# EAGLE board Rocket Panel v1.1 (EAGLE 5.06)
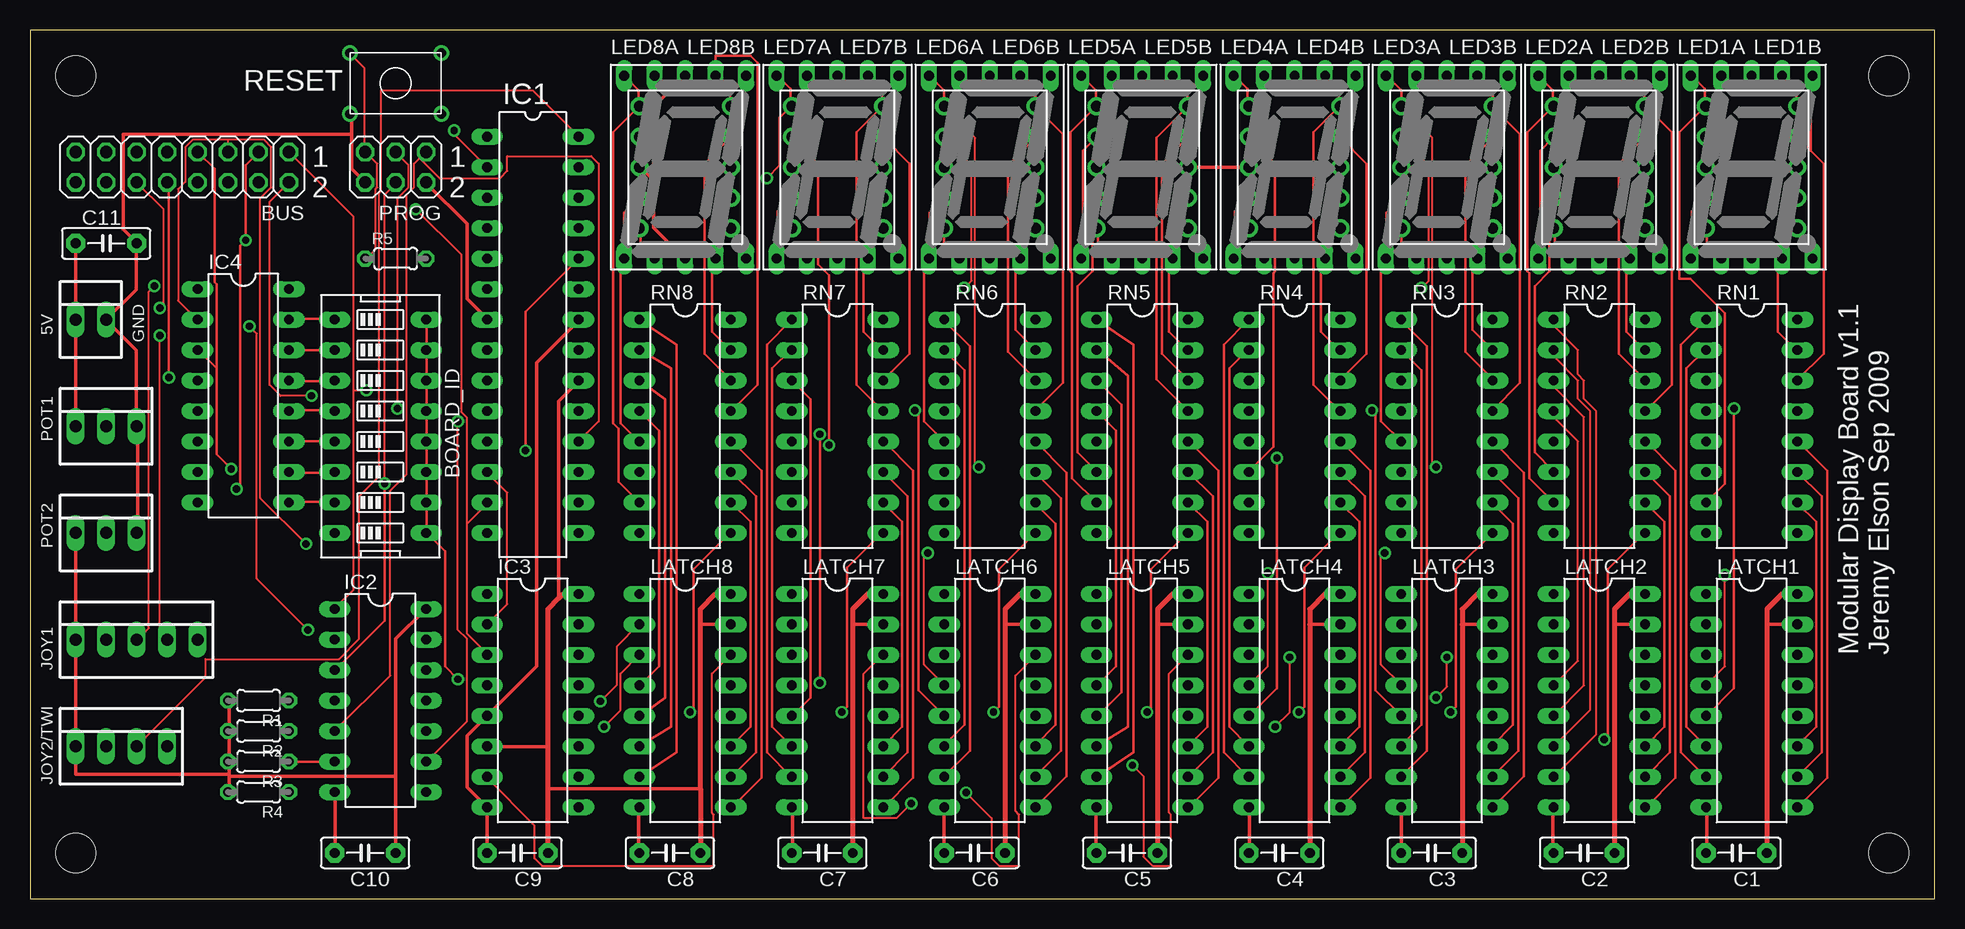
[diagram p0: board, top side]
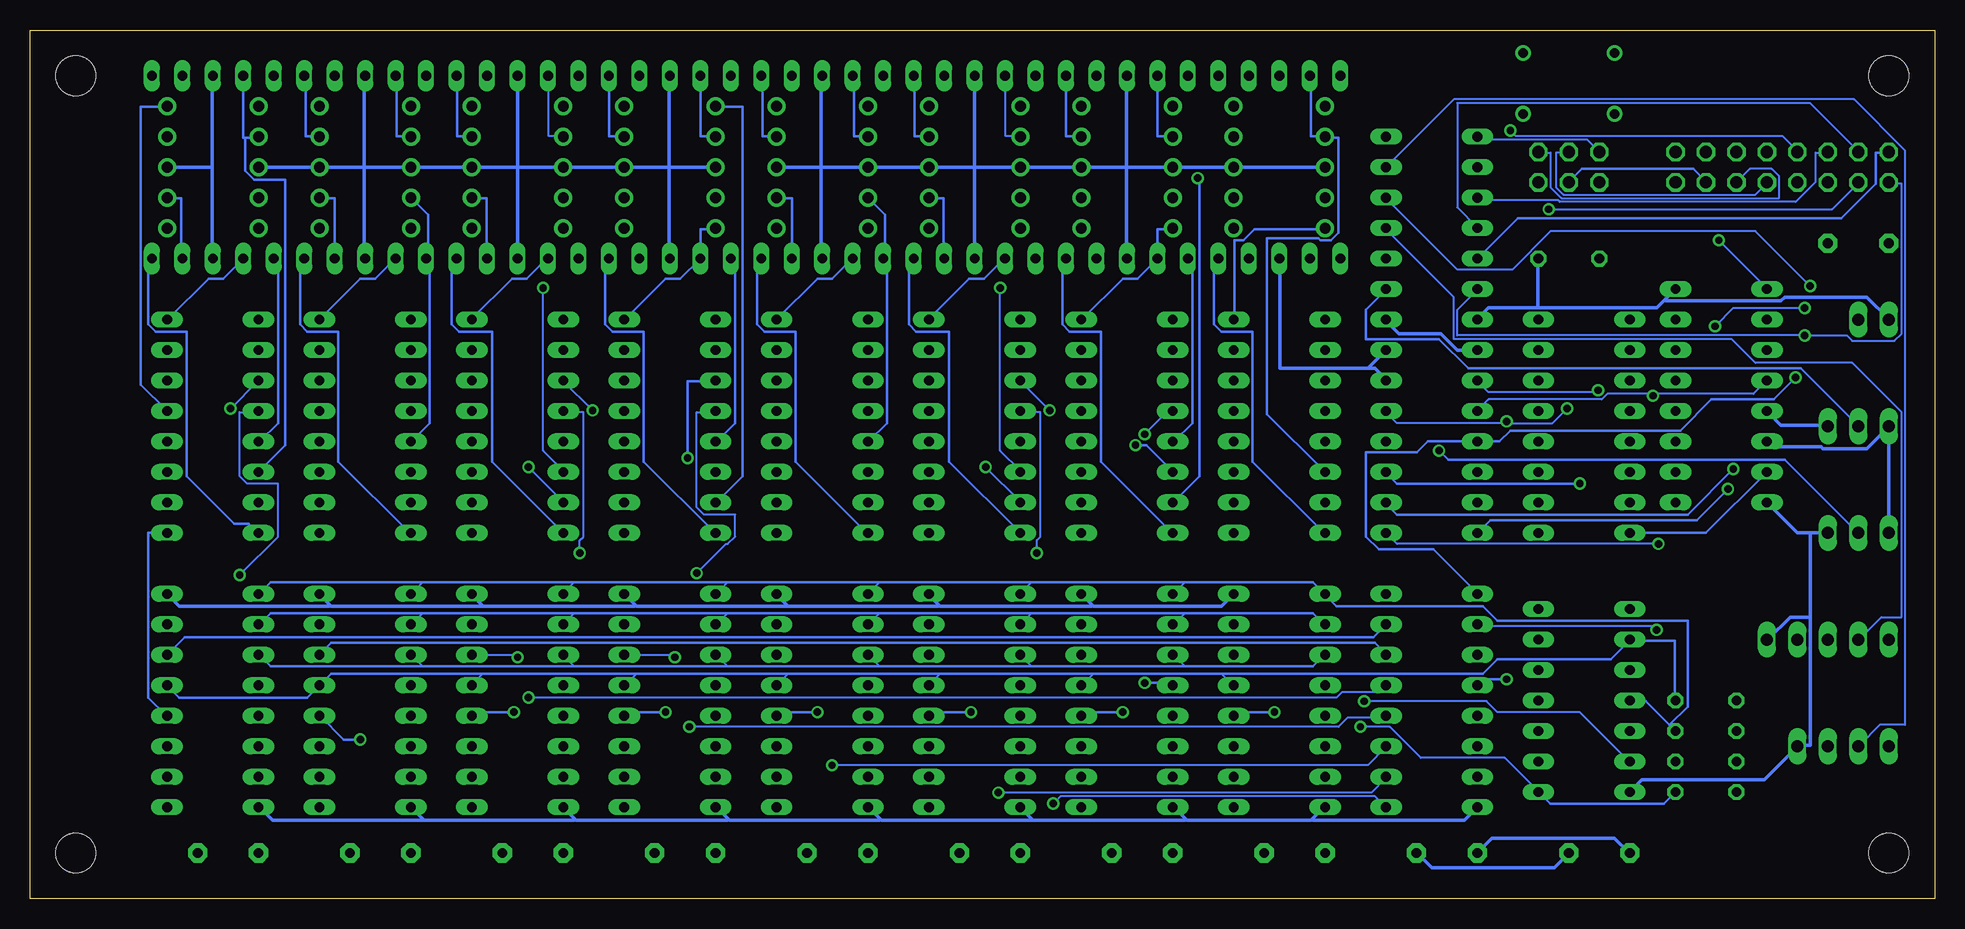
[diagram p1: board, bottom side, seen from below]

Size 158.75 x 72.39 mm. Coordinates in mm from the lower left corner, seen from the top.
Outline: 0,0 158.75,0 158.75,72.39 0,72.39 0,0
Copper layers (1*16): Top 0.035mm / dielectric 1.5mm / Bottom 0.035mm
Design rules "OurPCB *": minimum track width 6mil, minimum drill 24mil, track to track 6mil, track to pad 6mil, pad to pad 20mil, via to via 6mil, smd to smd 8mil, copper to edge 40mil, drill to drill 8mil, minimum pad ring 10mil, minimum via ring 8mil, stop-mask expansion 4mil, vias tented up to drill 0mil, thermal gap 10mil
Net classes: 0 default: width 0.152 mm, drill 0.152 mm, clearance 0.152 mm; 1 power: width 0.305 mm, drill 0.305 mm, clearance 0.152 mm to class 0, clearance 0.152 mm

## Footprints (pad centres in the part's own frame; a part is rotated, then mirrored left to right if it is on the bottom)
22-23-2021 = drill 1 long: 1 -1.27,0; 2 1.27,0
EDG-08 = drill 0.813 long: 1 -8.89,-3.81; 2 -6.35,-3.81; 3 -3.81,-3.81; 4 -1.27,-3.81; 5 1.27,-3.81; 6 3.81,-3.81; 7 6.35,-3.81; 8 8.89,-3.81; 9 8.89,3.81; 10 6.35,3.81; 11 3.81,3.81; 12 1.27,3.81; 13 -1.27,3.81; 14 -3.81,3.81; 15 -6.35,3.81; 16 -8.89,3.81
2X08 = drill 1.016 octagon: 1 -8.89,-1.27; 2 -8.89,1.27; 3 -6.35,-1.27; 4 -6.35,1.27; 5 -3.81,-1.27; 6 -3.81,1.27; 7 -1.27,-1.27; 8 -1.27,1.27; 9 1.27,-1.27; 10 1.27,1.27; 11 3.81,-1.27; 12 3.81,1.27; 13 6.35,-1.27; 14 6.35,1.27; 15 8.89,-1.27; 16 8.89,1.27
C5B2.5 = drill 0.813 pad 1.6 octagon: 1 -2.54,0; 2 2.54,0
DIL28-3 = drill 0.813 long: 1 -16.51,-3.81; 2 -13.97,-3.81; 3 -11.43,-3.81; 4 -8.89,-3.81; 5 -6.35,-3.81; 6 -3.81,-3.81; 7 -1.27,-3.81; 8 1.27,-3.81; 9 3.81,-3.81; 10 6.35,-3.81; 11 8.89,-3.81; 12 11.43,-3.81; 13 13.97,-3.81; 14 16.51,-3.81; 15 16.51,3.81; 16 13.97,3.81; 17 11.43,3.81; 18 8.89,3.81; 19 6.35,3.81; 20 3.81,3.81; 21 1.27,3.81; 22 -1.27,3.81; 23 -3.81,3.81; 24 -6.35,3.81; 25 -8.89,3.81; 26 -11.43,3.81; 27 -13.97,3.81; 28 -16.51,3.81
DIL14 = drill 0.813 long: 1 -7.62,-3.81; 2 -5.08,-3.81; 3 -2.54,-3.81; 4 0,-3.81; 5 2.54,-3.81; 6 5.08,-3.81; 7 7.62,-3.81; 8 7.62,3.81; 9 5.08,3.81; 10 2.54,3.81; 11 0,3.81; 12 -2.54,3.81; 13 -5.08,3.81; 14 -7.62,3.81
DIL16 = drill 0.813 long: 1 -8.89,-3.81; 2 -6.35,-3.81; 3 -3.81,-3.81; 4 -1.27,-3.81; 5 1.27,-3.81; 6 3.81,-3.81; 7 6.35,-3.81; 8 8.89,-3.81; 9 8.89,3.81; 10 6.35,3.81; 11 3.81,3.81; 12 1.27,3.81; 13 -1.27,3.81; 14 -3.81,3.81; 15 -6.35,3.81; 16 -8.89,3.81
22-23-2051 = drill 1 long: 1 -5.08,0; 2 -2.54,0; 3 0,0; 4 2.54,0; 5 5.08,0
22-23-2041 = drill 1 long: 1 -3.81,0; 2 -1.27,0; 3 1.27,0; 4 3.81,0
STAND-OFF = hole 3.302: 0,0
HDSP-M = drill 0.813 long: 1 -5.08,-7.62; 2 -2.54,-7.62; 3 0,-7.62; 4 2.54,-7.62; 5 5.08,-7.62; 6 5.08,7.62; 7 2.54,7.62; 8 0,7.62; 9 -2.54,7.62; 10 -5.08,7.62
LA-401 = drill 0.9 pad 1.5 round: 1 -3.81,5.08; 2 -3.81,2.54; 3 -3.81,0; 4 -3.81,-2.54; 5 -3.81,-5.08; 6 3.81,-5.08; 7 3.81,-2.54; 8 3.81,0; 9 3.81,2.54; 10 3.81,5.08
22-23-2031 = drill 1 long: 1 -2.54,0; 2 0,0; 3 2.54,0
2X03 = drill 1.016 octagon: 1 -2.54,-1.27; 2 -2.54,1.27; 3 0,-1.27; 4 0,1.27; 5 2.54,-1.27; 6 2.54,1.27
0204/5 = drill 0.813 octagon: 1 -2.54,0; 2 2.54,0
KSA_SWITCH_2X3MIL = drill 0.8 round: 1 -3.81,2.54; 2 3.81,2.54; 3 -3.81,-2.54; 4 3.81,-2.54

## Placement (x,y rotation side)
5V  [22-23-2021]  5.08,48.26 0 top
BOARD_ID  [EDG-08]  29.21,39.37 270 top
BUS  [2X08]  12.7,60.96 180 top
C1  [C5B2.5]  142.24,3.81 180 top
C2  [C5B2.5]  129.54,3.81 180 top
C3  [C5B2.5]  116.84,3.81 180 top
C4  [C5B2.5]  104.14,3.81 180 top
C5  [C5B2.5]  91.44,3.81 180 top
C6  [C5B2.5]  78.74,3.81 180 top
C7  [C5B2.5]  66.04,3.81 180 top
C8  [C5B2.5]  53.34,3.81 180 top
C9  [C5B2.5]  40.64,3.81 180 top
C10  [C5B2.5]  27.94,3.81 180 top
C11  [C5B2.5]  6.35,54.61 0 top
IC1  MEGA8-P  [DIL28-3]  41.91,46.99 270 top
IC2  7407N  [DIL14]  29.21,16.51 270 top
IC3  74LS138N  [DIL16]  41.91,16.51 270 top
IC4  74LS138N  [DIL16]  17.78,41.91 270 top
JOY1  22-23-2051  [22-23-2051]  8.89,21.59 0 top
JOY2/TWI  22-23-2041  [22-23-2041]  7.62,12.7 0 top
JP3  STAND-OFF  [STAND-OFF]  154.94,68.58 0 top
JP4  STAND-OFF  [STAND-OFF]  3.81,3.81 180 top
JP5  STAND-OFF  [STAND-OFF]  3.81,68.58 90 top
JP6  STAND-OFF  [STAND-OFF]  154.94,3.81 90 top
LATCH1  74259N  [DIL16]  143.51,16.51 270 top
LATCH2  74259N  [DIL16]  130.81,16.51 270 top
LATCH3  74259N  [DIL16]  118.11,16.51 270 top
LATCH4  74259N  [DIL16]  105.41,16.51 270 top
LATCH5  74259N  [DIL16]  92.71,16.51 270 top
LATCH6  74259N  [DIL16]  80.01,16.51 270 top
LATCH7  74259N  [DIL16]  67.31,16.51 270 top
LATCH8  74259N  [DIL16]  54.61,16.51 270 top
LED1A  LITEON-7SEG-56  [HDSP-M]  143.51,60.96 0 top
LED1B  LITEON-7SEG-39  [LA-401]  143.51,60.96 0 top
LED2A  LITEON-7SEG-56  [HDSP-M]  130.81,60.96 0 top
LED2B  LITEON-7SEG-39  [LA-401]  130.81,60.96 0 top
LED3A  LITEON-7SEG-56  [HDSP-M]  118.11,60.96 0 top
LED3B  LITEON-7SEG-39  [LA-401]  118.11,60.96 0 top
LED4A  LITEON-7SEG-56  [HDSP-M]  105.41,60.96 0 top
LED4B  LITEON-7SEG-39  [LA-401]  105.41,60.96 0 top
LED5A  LITEON-7SEG-56  [HDSP-M]  92.71,60.96 0 top
LED5B  LITEON-7SEG-39  [LA-401]  92.71,60.96 0 top
LED6A  LITEON-7SEG-56  [HDSP-M]  80.01,60.96 0 top
LED6B  LITEON-7SEG-39  [LA-401]  80.01,60.96 0 top
LED7A  LITEON-7SEG-56  [HDSP-M]  67.31,60.96 0 top
LED7B  LITEON-7SEG-39  [LA-401]  67.31,60.96 0 top
LED8A  LITEON-7SEG-56  [HDSP-M]  54.61,60.96 0 top
LED8B  LITEON-7SEG-39  [LA-401]  54.61,60.96 0 top
POT1  [22-23-2031]  6.35,39.37 0 top
POT2  [22-23-2031]  6.35,30.48 0 top
PROG  [2X03]  30.48,60.96 180 top
R1  [0204/5]  19.05,16.51 180 top
R2  [0204/5]  19.05,13.97 180 top
R3  [0204/5]  19.05,11.43 180 top
R4  [0204/5]  19.05,8.89 180 top
R5  [0204/5]  30.48,53.34 0 top
RESET  KSA-SWITCH-SPST  [KSA_SWITCH_2X3MIL]  30.48,67.94 0 top
RN1  [DIL16]  143.51,39.37 270 top
RN2  [DIL16]  130.81,39.37 270 top
RN3  [DIL16]  118.11,39.37 270 top
RN4  [DIL16]  105.41,39.37 270 top
RN5  [DIL16]  92.71,39.37 270 top
RN6  [DIL16]  80.01,39.37 270 top
RN7  [DIL16]  67.31,39.37 270 top
RN8  [DIL16]  54.61,39.37 270 top

## Library data of the parts
5V JOY1 JOY2/TWI POT1 POT2 = con-molex
BOARD_ID = special
BUS PROG = pinhead
C1-C11 = capacitor-wima
IC1 = atmel
IC2-IC4 LATCH1-LATCH8 = 74xx-us
JP3-JP6 RESET = SparkFun
LED1A LED1B LED2A LED2B LED3A LED3B LED4A LED4B LED5A LED5B LED6A LED6B LED7A LED7B LED8A LED8B = led-7-segment
R1-R5 = resistor
RN1-RN8 = resistor-dil

## Nets
/RESET: IC1.1 PROG.5 R5.1 RESET.1
BOARDSEL0: BUS.3 IC1.14 IC4.1
BOARDSEL1: BUS.5 IC1.15 IC4.2
BOARDSEL2: BUS.7 IC1.16 IC4.3
DATA: BUS.1 IC1.9 IC2.1
DIGSEL0: BUS.10 IC1.11 IC3.1
DIGSEL1: BUS.12 IC1.12 IC3.2
DIGSEL2: BUS.14 IC1.13 IC3.3
GND [power]: 5V.2 C1.2 C2.2 C3.2 C4.2 C5.2 C6.2 C7.2 C8.2 C9.2 C10.2 C11.2 IC1.8 IC1.22 IC2.7 IC3.5 IC3.8 IC4.5 IC4.8 JOY1.5 JOY2/TWI.4 LATCH1.8 LATCH2.8 LATCH3.8 LATCH4.8 LATCH5.8 LATCH6.8 LATCH7.8 LATCH8.8 POT1.3 POT2.3 PROG.6 RESET.3
INPUT0: BUS.9 IC1.2
INPUT1: BUS.11 IC1.3
INPUT2: BUS.13 IC1.4
INPUT3: BUS.15 IC1.5
N$1: IC1.23 POT1.2
N$3: LED3A.5 LED3B.6 RN3.8
N$4: LATCH3.12 RN3.9
N$5: IC1.24 POT2.2
N$6: IC1.25 JOY1.2
N$7: IC3.7 LATCH8.14
N$8: LATCH3.9 RN3.12
N$9: LATCH3.10 RN3.11
N$10: LATCH3.11 RN3.10
N$11: LED3A.1 LED3B.4 RN3.5
N$12: BOARD_ID.1 IC4.15
N$13: BOARD_ID.2 IC4.14
N$14: BOARD_ID.3 IC4.13
N$15: BOARD_ID.4 IC4.12
N$16: BOARD_ID.5 IC4.11
N$17: BOARD_ID.6 IC4.10
N$18: BOARD_ID.7 IC4.9
N$19: BOARD_ID.8 IC4.7
N$20: LATCH2.4 RN2.4
N$21: IC3.15 LATCH1.14
N$22: IC3.14 LATCH2.14
N$23: IC1.26 JOY1.3
N$24: IC3.12 LATCH4.14
N$25: LATCH2.5 RN2.3
N$26: LATCH2.6 RN2.2
N$27: LATCH2.7 RN2.1
N$28: LED2A.7 LED2B.10 RN2.13
N$29: LATCH2.9 RN2.12
N$30: LATCH2.10 RN2.11
N$31: LATCH2.11 RN2.10
N$32: LED2A.6 LED2B.9 RN2.14
N$33: LED2A.4 LED2B.7 RN2.15
N$34: LED2A.2 LED2B.5 RN2.16
N$35: LED2A.1 LED2B.4 RN2.5
N$36: LED2A.9 LED2B.2 RN2.6
N$37: LED2A.10 LED2B.1 RN2.7
N$38: LED3A.9 LED3B.2 RN3.6
N$39: LED2A.5 LED2B.6 RN2.8
N$40: LATCH2.12 RN2.9
N$41: IC3.11 LATCH5.14
N$42: LED3A.10 LED3B.1 RN3.7
N$43: IC3.9 LATCH7.14
N$44: IC1.27 JOY2/TWI.2
N$45: BOARD_ID.9 BOARD_ID.10 BOARD_ID.11 BOARD_ID.12 BOARD_ID.13 BOARD_ID.14 BOARD_ID.15 BOARD_ID.16 IC3.4
N$46: LATCH3.4 RN3.4
N$47: LATCH3.5 RN3.3
N$48: LATCH3.6 RN3.2
N$49: LATCH3.7 RN3.1
N$50: LED3A.7 LED3B.10 RN3.13
N$51: LED3A.6 LED3B.9 RN3.14
N$52: LED3A.4 LED3B.7 RN3.15
N$53: LED3A.2 LED3B.5 RN3.16
N$54: LED4A.5 LED4B.6 RN4.8
N$55: LATCH4.12 RN4.9
N$56: IC1.28 JOY2/TWI.3
N$57: LATCH4.9 RN4.12
N$58: LATCH4.10 RN4.11
N$59: LATCH4.11 RN4.10
N$60: LED4A.1 LED4B.4 RN4.5
N$61: LED4A.9 LED4B.2 RN4.6
N$62: LED4A.10 LED4B.1 RN4.7
N$63: LATCH4.4 RN4.4
N$64: LATCH4.5 RN4.3
N$65: LATCH4.6 RN4.2
N$66: LATCH4.7 RN4.1
N$67: LED4A.7 LED4B.10 RN4.13
N$68: LED4A.6 LED4B.9 RN4.14
N$69: LED4A.4 LED4B.7 RN4.15
N$70: LED4A.2 LED4B.5 RN4.16
N$71: LED1A.5 LED1B.6 RN1.8
N$72: LATCH1.12 RN1.9
N$73: IC3.13 LATCH3.14
N$74: LATCH1.9 RN1.12
N$75: LATCH1.10 RN1.11
N$76: LATCH1.11 RN1.10
N$77: LED1A.1 LED1B.4 RN1.5
N$78: LED1A.9 LED1B.2 RN1.6
N$79: LED1A.10 LED1B.1 RN1.7
N$80: LATCH1.4 RN1.4
N$81: LATCH1.5 RN1.3
N$82: LATCH1.6 RN1.2
N$83: LATCH1.7 RN1.1
N$84: LED1A.7 LED1B.10 RN1.13
N$85: LED1A.6 LED1B.9 RN1.14
N$86: LED1A.4 LED1B.7 RN1.15
N$87: LED1A.2 LED1B.5 RN1.16
N$88: LED5A.5 LED5B.6 RN5.8
N$89: LATCH5.12 RN5.9
N$91: LATCH5.9 RN5.12
N$92: LATCH5.10 RN5.11
N$93: LATCH5.11 RN5.10
N$94: LED5A.1 LED5B.4 RN5.5
N$95: LED5A.9 LED5B.2 RN5.6
N$96: LED5A.10 LED5B.1 RN5.7
N$97: LATCH5.4 RN5.4
N$98: LATCH5.5 RN5.3
N$99: LATCH5.6 RN5.2
N$100: LATCH5.7 RN5.1
N$101: LED5A.7 LED5B.10 RN5.13
N$102: LED5A.6 LED5B.9 RN5.14
N$103: LED5A.4 LED5B.7 RN5.15
N$104: LED5A.2 LED5B.5 RN5.16
N$105: LED6A.5 LED6B.6 RN6.8
N$106: LATCH6.12 RN6.9
N$108: LATCH6.9 RN6.12
N$109: LATCH6.10 RN6.11
N$110: LATCH6.11 RN6.10
N$111: LED6A.1 LED6B.4 RN6.5
N$112: LED6A.9 LED6B.2 RN6.6
N$113: LED6A.10 LED6B.1 RN6.7
N$114: LATCH6.4 RN6.4
N$115: LATCH6.5 RN6.3
N$116: LATCH6.6 RN6.2
N$117: LATCH6.7 RN6.1
N$118: LED6A.7 LED6B.10 RN6.13
N$119: LED6A.6 LED6B.9 RN6.14
N$120: LED6A.4 LED6B.7 RN6.15
N$121: LED6A.2 LED6B.5 RN6.16
N$122: LED7A.5 LED7B.6 RN7.8
N$123: LATCH7.12 RN7.9
N$125: LATCH7.9 RN7.12
N$126: LATCH7.10 RN7.11
N$127: LATCH7.11 RN7.10
N$128: LED7A.1 LED7B.4 RN7.5
N$129: LED7A.9 LED7B.2 RN7.6
N$130: LED7A.10 LED7B.1 RN7.7
N$131: LATCH7.4 RN7.4
N$132: LATCH7.5 RN7.3
N$133: LATCH7.6 RN7.2
N$134: LATCH7.7 RN7.1
N$135: LED7A.7 LED7B.10 RN7.13
N$136: LED7A.6 LED7B.9 RN7.14
N$137: LED7A.4 LED7B.7 RN7.15
N$138: LED7A.2 LED7B.5 RN7.16
N$139: LED8A.5 LED8B.6 RN8.8
N$140: LATCH8.12 RN8.9
N$142: LATCH8.9 RN8.12
N$143: LATCH8.10 RN8.11
N$144: LATCH8.11 RN8.10
N$145: LED8A.1 LED8B.4 RN8.5
N$146: LED8A.9 LED8B.2 RN8.6
N$147: LED8A.10 LED8B.1 RN8.7
N$148: LATCH8.4 RN8.4
N$149: LATCH8.5 RN8.3
N$150: LATCH8.6 RN8.2
N$151: LATCH8.7 RN8.1
N$152: LED8A.7 LED8B.10 RN8.13
N$153: LED8A.6 LED8B.9 RN8.14
N$154: LED8A.4 LED8B.7 RN8.15
N$155: LED8A.2 LED8B.5 RN8.16
N$169: IC3.10 LATCH6.14
N_DATA: IC2.2 LATCH1.13 LATCH2.13 LATCH3.13 LATCH4.13 LATCH5.13 LATCH6.13 LATCH7.13 LATCH8.13 R1.1
N_SEGSEL0: IC2.4 LATCH1.1 LATCH2.1 LATCH3.1 LATCH4.1 LATCH5.1 LATCH6.1 LATCH7.1 LATCH8.1 R2.1
N_SEGSEL1: IC2.6 LATCH1.2 LATCH2.2 LATCH3.2 LATCH4.2 LATCH5.2 LATCH6.2 LATCH7.2 LATCH8.2 R3.1
N_SEGSEL2: IC2.8 LATCH1.3 LATCH2.3 LATCH3.3 LATCH4.3 LATCH5.3 LATCH6.3 LATCH7.3 LATCH8.3 R4.1
SEGSEL0: BUS.4 IC1.17 IC2.3 PROG.4
SEGSEL1: BUS.6 IC1.18 IC2.5 PROG.1
SEGSEL2: BUS.8 IC1.19 IC2.9 PROG.3
SPARE: BUS.16 IC1.6 JOY1.4
STROBE: BUS.2 IC1.10 IC4.4
VCC [power]: 5V.1 C1.1 C2.1 C3.1 C4.1 C5.1 C6.1 C7.1 C8.1 C9.1 C10.1 C11.1 IC1.7 IC1.20 IC1.21 IC2.14 IC3.6 IC3.16 IC4.6 IC4.16 JOY1.1 JOY2/TWI.1 LATCH1.15 LATCH1.16 LATCH2.15 LATCH2.16 LATCH3.15 LATCH3.16 LATCH4.15 LATCH4.16 LATCH5.15 LATCH5.16 LATCH6.15 LATCH6.16 LATCH7.15 LATCH7.16 LATCH8.15 LATCH8.16 LED1A.3 LED1A.8 LED1B.3 LED1B.8 LED2A.3 LED2A.8 LED2B.3 LED2B.8 LED3A.3 LED3A.8 LED3B.3 LED3B.8 LED4A.3 LED4A.8 LED4B.3 LED4B.8 LED5A.3 LED5A.8 LED5B.3 LED5B.8 LED6A.3 LED6A.8 LED6B.3 LED6B.8 LED7A.3 LED7A.8 LED7B.3 LED7B.8 LED8A.3 LED8A.8 LED8B.3 LED8B.8 POT1.1 POT2.1 PROG.2 R1.2 R2.2 R3.2 R4.2 R5.2

## Tracks (layer width: path | path; a pad name or v marks a point on that pad's centre or on a via)
/RESET
  Top 0.152: RESET.1 26.67,70.41 27.89,69.19 27.89,62.33 PROG.5 28.04,62.18 28.96,61.27 28.96,59.28 28.8,59.13 28.8,54.1 28.04,53.34 R5.1
  Bottom 0.152: IC1.1 38.1,63.4 37.95,63.25 28.96,63.25 28.04,62.33 PROG.5
BOARDSEL0  (via drill 0.61)
  Top 0.203: BUS.3 19.05,62.18 17.98,61.11 v17.98,54.86 17.53,54.41 17.53,34.44 v17.22,34.14
  Bottom 0.203: v17.98,54.86 14.02,50.9 IC4.1 | IC1.14 37.03,31.55 19.81,31.55 v17.22,34.14
BOARDSEL1  (via drill 0.61)
  Top 0.152: 16.46,63.25 13.56,63.25 12.95,62.64 12.95,59.74 12.34,59.13 12.34,49.84 13.87,48.31 IC4.2 | 16.46,63.25 16.46,62.33 BUS.5 | v23.01,29.57 19.2,33.38 19.2,58.37 20.12,59.28 20.12,62.64 19.51,63.25 16.46,63.25
  Bottom 0.152: IC1.15 44.81,29.57 v23.01,29.57
BOARDSEL2  (via drill 0.61)
  Top 0.203: v16.76,35.81 15.54,37.03 15.54,44.2 | 15.54,44.2 14.02,45.72 IC4.3 | 15.54,44.2 15.54,51.21 15.39,51.36 15.39,60.81 14.02,62.18 BUS.7
  Bottom 0.203: v16.76,35.81 20.57,32 44.81,32 45.72,32.92 IC1.16
DATA  (via drill 0.61)
  Top 0.152: 26.98,42.37 26.98,56.84 21.64,62.18 BUS.1 | 26.98,42.37 26.98,25.76 25.45,24.23 IC2.1 | 26.98,42.37 v28.04,42.37
  Bottom 0.152: v28.04,42.37 28.19,42.22 37.19,42.22 38.1,43.13 IC1.9
DIGSEL0  (via drill 0.61)
  Top 0.203: v11.58,43.43 11.58,59.44 11.43,59.59 BUS.10
  Bottom 0.203: IC3.1 38.1,25.45 41.76,29.11 46.33,29.11 47.4,30.18 47.4,37.19 43.13,37.19 42.22,38.1 IC1.11 36.27,38.1 35.36,39.01 21.18,39.01 18.59,41.6 13.41,41.6 v11.58,43.43
DIGSEL1  (via drill 0.61)
  Top 0.152: IC3.2 39.78,24.54 39.78,33.83 38.1,35.51 IC1.12 | v10.82,49.23 11.12,49.53 11.12,57.45 8.99,59.59 BUS.12 | v18.29,47.7 18.9,47.09 18.9,26.67 v23.16,22.4
  Bottom 0.152: v10.82,49.23 16.76,49.23 v18.29,47.7 | v23.16,22.4 23.47,22.71 37.95,22.71 IC3.2
DIGSEL2  (via drill 0.61)
  Top 0.152: 36.42,31.24 36.42,22.1 38.1,20.42 IC3.3 | 36.42,31.24 38.1,32.92 IC1.13 | v32.16,57.45 35.97,53.65 35.97,40.54 36.42,40.08 36.42,31.24
  Bottom 0.152: v32.16,57.45 8.53,57.45 6.4,59.59 BUS.14
GND
  Top 0.305: IC2.7 25.45,8.84 25.45,3.81 C10.2 | C9.2 IC3.8 36.42,9.3 36.42,13.56 IC3.5 42.22,19.36 42.22,44.65 45.72,48.16 IC1.22 | LATCH1.8 139.75,7.62 139.75,3.81 C1.2 | LATCH2.8 126.95,7.62 126.95,3.81 C2.2 | LATCH3.8 C3.2 | LATCH4.8 101.65,7.62 101.65,3.81 C4.2 | LATCH5.8 88.85,7.62 88.85,3.81 C5.2 | LATCH6.8 C6.2 | LATCH8.8 50.75,7.62 50.75,3.81 C8.2 | LATCH7.8 63.55,7.62 63.55,3.81 C7.2 | 26.82,63.7 26.82,60.81 27.89,59.74 PROG.6 | 26.82,63.7 26.82,65.23 26.67,65.38 RESET.3 | 26.82,63.7 7.77,63.7 7.77,55.78 8.84,54.71 C11.2 8.84,54.56 8.84,50.75 6.4,48.31 5V.2 6.4,48.16 8.84,45.72 8.84,39.47 POT1.3 8.99,39.32 8.99,30.48 POT2.3
  Bottom 0.305: C9.2 36.88,5.03 26.67,5.03 25.45,3.81 C10.2 | 51.89,6.63 51.97,6.55 62.33,6.55 62.41,6.63 | 51.89,6.63 50.9,7.62 LATCH8.8 | 62.41,6.63 63.4,7.62 LATCH7.8 | 75.21,6.63 75.13,6.55 62.48,6.55 62.41,6.63 | 75.21,6.63 LATCH6.8 | 87.86,6.63 87.78,6.55 75.29,6.55 75.21,6.63 | 87.86,6.63 88.85,7.62 LATCH5.8 | 100.51,6.63 100.43,6.55 87.94,6.55 87.86,6.63 | 100.51,6.63 101.5,7.62 LATCH4.8 | 113.31,6.63 113.23,6.55 100.58,6.55 100.51,6.63 | 113.31,6.63 LATCH3.8 | 125.96,6.63 125.88,6.55 113.39,6.55 113.31,6.63 | 125.96,6.63 126.95,7.62 LATCH2.8 | LATCH1.8 139.6,7.62 138.53,6.55 126.03,6.55 125.96,6.63 | IC3.8 39.17,6.55 51.82,6.55 51.89,6.63 | IC4.5 13.87,40.54 12.8,39.47 8.99,39.47 POT1.3 | IC2.7 25.3,8.99 24.38,9.91 14.17,9.91 11.43,12.65 JOY2/TWI.4 11.43,12.8 10.36,12.8 10.36,23.47 | IC1.8 39.78,45.72 41.15,47.09 44.65,47.09 45.72,48.16 IC1.22 | 10.36,30.48 8.99,30.48 POT2.3 | 10.36,30.48 11.43,30.48 13.87,32.92 IC4.8 | 10.36,23.47 10.36,30.48 | 10.36,23.47 12.04,23.47 13.87,21.64 JOY1.5
INPUT0  (via drill 0.61)
  Top 0.152: IC1.2 35.36,63.7 v35.36,64.01
  Bottom 0.152: v35.36,64.01 34.9,63.55 12.65,63.55 11.43,62.33 BUS.9
INPUT1
  Bottom 0.152: IC1.3 38.1,58.37 37.95,58.22 31.39,58.22 31.24,58.06 11.58,58.06 9.91,59.74 9.91,62.18 8.99,62.18 BUS.11
INPUT2
  Bottom 0.152: IC1.4 38.1,55.93 39.78,57.61 39.78,66.29 10.36,66.29 6.4,62.33 BUS.13
INPUT3
  Bottom 0.203: IC1.5 34.75,56.69 7.77,56.69 4.88,59.59 4.88,62.18 3.81,62.18 BUS.15
N$1
  Bottom 0.203: IC1.23 45.72,50.75 47.4,49.07 47.4,46.63 41.3,46.63 38.86,44.2 11.12,44.2 6.4,39.47 POT1.2
N$3
  Top 0.203: LED3B.6 121.92,55.78 123.14,54.56 123.14,53.34 LED3A.5
  Bottom 0.203: RN3.8 120.24,36.42 120.24,47.24 122.99,47.24 123.6,47.85 123.6,53.34 123.29,53.34 LED3A.5
N$4  (via drill 0.61)
  Top 0.203: v118.42,15.54 118.87,16 118.87,27.43 RN3.9
  Bottom 0.203: LATCH3.12 121.61,15.54 v118.42,15.54
N$5  (via drill 0.61)
  Top 0.203: IC1.24 41.3,48.92 v41.3,37.34
  Bottom 0.203: v41.3,37.34 40.54,36.58 12.5,36.58 6.4,30.48 POT2.2
N$6
  Bottom 0.152: IC1.25 45.72,55.78 40.08,50.14 40.08,46.63 16.92,46.63 14.94,44.65 6.86,44.65 2.74,40.54 2.74,23.47 4.42,23.47 6.25,21.64 JOY1.2
N$7
  Top 0.152: IC3.7 38.1,10.06 42.06,6.1 42.06,3.35 42.67,2.74 57,2.74 57,7.01 56.84,7.16 56.84,18.75 58.37,20.27 LATCH8.14
N$8
  Top 0.203: LATCH3.9 124.51,10.21 124.51,35.51 RN3.12
N$9
  Top 0.203: LATCH3.10 121.92,10.21 124.05,12.34 124.05,33.38 121.92,35.51 RN3.11
N$10
  Top 0.203: LATCH3.11 121.92,12.8 123.6,14.48 123.6,31.24 121.92,32.92 RN3.10
N$11
  Top 0.203: RN3.5 112.62,39.78 112.62,53.03 112.93,53.34 LED3A.1 113.08,53.34 113.08,57.15 114.3,58.37 LED3B.4
N$12
  Top 0.203: IC4.15 21.64,48.31 25.3,48.31 BOARD_ID.1
N$13
  Top 0.203: IC4.14 21.64,45.72 25.3,45.72 BOARD_ID.2
N$14
  Top 0.203: IC4.13 21.64,43.13 25.3,43.13 BOARD_ID.3
N$15
  Top 0.203: IC4.12 21.64,40.69 25.3,40.69 BOARD_ID.4
N$16
  Top 0.203: IC4.11 21.64,38.1 25.3,38.1 BOARD_ID.5
N$17
  Top 0.203: IC4.10 21.64,35.51 25.3,35.51 BOARD_ID.6
N$18
  Top 0.203: IC4.9 21.64,33.07 25.3,33.07 BOARD_ID.7
N$19
  Bottom 0.203: IC4.7 14.02,35.51 19.05,30.48 25.3,30.48 BOARD_ID.8
N$20
  Top 0.152: LATCH2.4 129.03,19.81 129.03,38.1 127,40.13 RN2.4
N$21
  Bottom 0.203: IC3.15 46.79,21.79 145.85,21.79 147.22,20.42 LATCH1.14
N$22
  Bottom 0.203: IC3.14 45.72,20.42 46.63,21.34 133.66,21.34 134.57,20.42 LATCH2.14
N$23  (via drill 0.61)
  Top 0.152: v10.36,51.05 9.91,50.6 9.91,22.55 8.99,21.64 JOY1.3
  Bottom 0.152: v10.36,51.05 14.94,55.63 32,55.63 35.2,52.43 39.78,52.43 45.72,58.37 IC1.26
N$24  (via drill 0.61)
  Top 0.152: v103.78,14.33 105,15.54 v105,20.12
  Bottom 0.152: IC3.12 45.87,15.09 48.92,15.09 49.68,14.33 v103.78,14.33 | v105,20.12 105.16,20.27 109.12,20.27 LATCH4.14
N$25
  Top 0.152: RN2.3 127,42.67 129.54,40.13 129.54,17.78 LATCH2.5
N$26
  Top 0.152: RN2.2 127,45.21 129.03,43.18 129.03,41.66 130.05,40.64 130.05,15.75 LATCH2.6
N$27
  Top 0.152: RN2.1 127,47.75 129.03,45.72 129.03,43.69 129.54,43.18 129.54,41.66 130.56,40.64 130.56,13.72 LATCH2.7
N$28
  Top 0.203: LED2A.7 134.57,67.36 134.57,66.14 LED2B.10 134.72,65.99 136.85,63.86 136.85,42.82 134.72,40.69 RN2.13
N$29
  Top 0.203: LATCH2.9 134.72,7.62 137.16,10.06 137.16,35.66 134.72,38.1 RN2.12
N$30
  Top 0.203: LATCH2.10 134.72,10.21 136.7,12.19 136.7,33.53 134.72,35.51 RN2.11
N$31
  Top 0.203: LATCH2.11 134.72,12.8 136.25,14.33 136.25,31.39 134.72,32.92 RN2.10
N$32
  Top 0.203: RN2.14 134.57,43.28 132.44,45.41 132.44,61.27 134.57,63.4 LED2B.9
  Bottom 0.203: LED2A.6 135.79,68.58 135.79,63.55 134.72,63.55 LED2B.9
N$33
  Top 0.203: LED2A.4 133.04,53.03 133.04,47.24 134.57,45.72 RN2.15
  Bottom 0.203: LED2A.4 133.35,58.37 134.57,58.37 LED2B.7
N$34
  Top 0.203: LED2A.2 128.17,53.34 127.1,54.41 127.1,55.78 LED2B.5
  Bottom 0.203: RN2.16 134.57,48.31 131.22,51.66 130,51.66 128.32,53.34 LED2A.2
N$35
  Bottom 0.203: 125.58,53.34 LED2A.1 125.58,53.34 | 125.58,53.34 125.42,53.34 125.42,39.62 126.95,38.1 RN2.5 | 125.58,53.34 125.58,57 126.95,58.37 LED2B.4
N$36
  Top 0.203: RN2.6 126.95,35.66 125.42,37.19 125.42,51.05 126.64,52.27 126.64,54.71 125.88,55.47 125.88,62.33 126.95,63.4 LED2B.2
  Bottom 0.203: LED2A.9 128.17,68.58 128.17,63.55 127.1,63.55 LED2B.2
N$37
  Top 0.203: LED2A.10 126.95,67.36 126.95,66.14 LED2B.1 126.95,65.99 124.82,63.86 124.82,52.27 124.97,52.12 124.97,35.05 126.95,33.07 RN2.7
N$38  (via drill 0.61)
  Top 0.152: v115.98,50.9 116.59,51.51 116.59,61.11 114.3,63.4 LED3B.2
  Bottom 0.152: v115.98,50.9 115.98,37.34 114.3,35.66 RN3.6 | LED3A.9 115.52,68.58 115.52,63.55 114.3,63.55 LED3B.2
N$39
  Top 0.203: LED2B.6 134.72,55.78 135.79,54.71 135.79,53.34 LED2A.5
  Bottom 0.203: RN2.8 127.1,30.48 133.04,36.42 133.04,47.24 135.64,47.24 136.25,47.85 136.25,53.34 135.94,53.34 LED2A.5
N$40  (via drill 0.61)
  Top 0.203: v131.22,13.26 131.52,13.56 131.52,27.43 134.57,30.48 RN2.9
  Bottom 0.203: v131.22,13.26 132.59,13.26 134.57,15.24 LATCH2.12
N$41  (via drill 0.61)
  Top 0.152: v91.9,11.12 92.81,10.21 92.81,3.5 93.57,2.74 95.1,2.74 95.1,7.01 94.94,7.16 94.94,18.75 96.47,20.27 LATCH5.14
  Bottom 0.152: v91.9,11.12 47.24,11.12 45.72,12.65 IC3.11
N$42  (via drill 0.61)
  Top 0.152: v117.2,35.97 116.89,36.27 116.89,63.4 114.3,65.99 LED3B.1
  Top 0.203: LED3A.10 113.08,68.58 114.3,67.36 114.3,66.14 LED3B.1
  Bottom 0.152: v117.2,35.97 114.3,33.07 RN3.7
N$43  (via drill 0.61)
  Top 0.152: v73.46,7.92 72.24,6.71 69.49,6.71 69.49,18.75 71.02,20.27 LATCH7.14
  Bottom 0.152: IC3.9 46.63,8.53 72.85,8.53 v73.46,7.92
N$44
  Bottom 0.152: IC1.27 40.08,66.6 6.71,66.6 2.44,62.33 2.44,14.48 4.57,14.48 6.25,12.8 JOY2/TWI.2
N$45  (via drill 0.61)
  Top 0.203: 33.07,45.72 33.07,48.16 BOARD_ID.16 | 33.07,45.72 BOARD_ID.15 33.07,45.72 | 33.07,38.1 33.07,40.54 BOARD_ID.13 33.07,40.69 33.07,43.13 BOARD_ID.14 33.07,43.28 33.07,45.72 | 33.07,38.1 BOARD_ID.12 33.07,38.1 | 33.07,30.48 33.07,32.92 BOARD_ID.10 33.07,33.07 33.07,35.51 BOARD_ID.11 33.07,35.66 33.07,38.1 | 33.07,30.48 BOARD_ID.9 33.07,30.48 | v35.66,18.29 34.59,19.36 34.59,28.96 33.07,30.48
  Bottom 0.203: v35.66,18.29 37.64,18.29 38.1,17.83 IC3.4
N$46  (via drill 0.61)
  Top 0.152: v112.93,28.8 112.62,28.5 112.62,19.51 114.3,17.83 LATCH3.4
  Bottom 0.152: v112.93,28.8 112.93,29.87 112.62,30.18 112.62,40.54 114.3,40.54 RN3.4
N$47  (via drill 0.61)
  Top 0.203: LATCH3.5 112.17,17.37 112.17,40.39 v111.86,40.69
  Bottom 0.203: v111.86,40.69 114.3,43.13 RN3.3
N$48
  Top 0.203: RN3.2 115.98,44.04 115.98,14.48 114.3,12.8 LATCH3.6
N$49
  Top 0.203: LATCH3.7 114.3,10.21 116.43,12.34 116.43,46.02 114.3,48.16 RN3.1
N$50
  Top 0.203: LED3A.7 120.7,68.58 121.92,67.36 121.92,66.14 LED3B.10 121.92,65.99 124.21,63.7 124.21,42.98 121.92,40.69 RN3.13
N$51
  Top 0.203: RN3.14 121.92,43.28 119.63,45.57 119.63,61.11 121.92,63.4 LED3B.9
  Bottom 0.203: LED3A.6 123.14,68.58 123.14,63.55 121.92,63.55 LED3B.9
N$52
  Top 0.203: RN3.15 120.24,47.4 120.24,53.03 120.55,53.34 LED3A.4
  Bottom 0.203: LED3A.4 120.7,53.34 120.7,58.37 121.92,58.37 LED3B.7
N$53
  Top 0.203: LED3A.2 115.52,53.34 114.3,54.56 114.3,55.78 LED3B.5
  Bottom 0.203: RN3.16 121.92,48.31 118.57,51.66 117.35,51.66 115.67,53.34 LED3A.2
N$54
  Top 0.203: LED4A.5 110.49,54.56 109.27,55.78 LED4B.6
  Bottom 0.203: LED4A.5 110.8,53.34 110.8,47.85 110.19,47.24 107.59,47.24 107.59,36.42 101.65,30.48 RN4.8
N$55  (via drill 0.61)
  Top 0.203: v105.77,15.54 106.22,16 106.22,27.58 109.12,30.48 RN4.9
  Bottom 0.203: v105.77,15.54 108.81,15.54 109.12,15.24 LATCH4.12
N$56
  Top 0.152: IC1.28 45.72,63.55 41.91,67.36 29.26,67.36 29.26,58.98 29.11,58.83 29.11,35.2 27.43,33.53 27.43,21.64 25.76,19.96 14.63,19.96 14.63,18.44 8.99,12.8 JOY2/TWI.3
N$57
  Top 0.203: LATCH4.9 109.27,7.62 111.71,10.06 111.71,35.66 109.27,38.1 RN4.12
N$58
  Top 0.203: LATCH4.10 109.27,10.21 111.25,12.19 111.25,33.53 109.27,35.51 RN4.11
N$59
  Top 0.203: LATCH4.11 109.27,12.8 110.8,14.33 110.8,31.39 109.27,32.92 RN4.10
N$60
  Top 0.203: LED4B.4 101.5,58.37 100.43,57.3 100.43,53.34 LED4A.1
  Bottom 0.203: RN4.5 101.5,38.1 99.97,39.62 99.97,53.34 100.28,53.34 LED4A.1
N$61
  Top 0.203: RN4.6 101.65,35.66 103.63,37.64 103.63,52.12 103.78,52.27 103.78,61.27 101.65,63.4 LED4B.2
  Bottom 0.203: LED4A.9 102.87,63.55 101.65,63.55 LED4B.2
N$62
  Top 0.203: LED4A.10 100.43,68.58 101.5,67.51 101.5,66.14 LED4B.1
  Bottom 0.203: RN4.7 101.5,33.07 99.36,35.2 99.36,65.99 101.5,65.99 LED4B.1
N$63  (via drill 0.61)
  Top 0.152: v103.17,27.13 103.17,19.36 101.65,17.83 LATCH4.4
  Bottom 0.152: v103.17,27.13 100.74,29.57 100.58,29.57 99.97,30.18 99.97,32 102.56,32 103.17,32.61 103.17,40.54 101.65,40.54 RN4.4
N$64  (via drill 0.61)
  Top 0.203: v103.94,36.73 103.94,17.53 101.65,15.24 LATCH4.5
  Bottom 0.203: v103.94,36.73 103.94,43.13 101.65,43.13 RN4.3
N$65
  Top 0.203: LATCH4.6 101.5,12.8 99.97,14.33 99.97,44.2 101.5,45.72 RN4.2
N$66
  Top 0.203: LATCH4.7 101.5,10.21 99.52,12.19 99.52,46.18 101.5,48.16 RN4.1
N$67
  Top 0.203: LED4A.7 108.05,68.58 109.12,67.51 109.12,66.14 LED4B.10 109.12,65.99 106.98,63.86 106.98,42.82 109.12,40.69 RN4.13
N$68
  Top 0.203: RN4.14 109.27,43.28 111.4,45.41 111.4,61.27 109.27,63.4 LED4B.9
  Bottom 0.203: LED4A.6 110.49,63.55 109.27,63.55 LED4B.9
N$69
  Top 0.203: LED4B.7 109.12,58.37 108.2,57.45 108.2,53.49 108.05,53.34 LED4A.4 107.9,53.34 107.59,53.03 107.59,47.24 109.12,45.72 RN4.15
N$70
  Bottom 0.203: LED4B.5 101.65,55.78 102.87,55.78 LED4A.2 104.55,51.66 105.77,51.66 109.12,48.31 RN4.16
N$71
  Top 0.203: LED1A.5 148.59,54.56 147.37,55.78 LED1B.6
  Bottom 0.203: LED1A.5 148.9,53.34 148.9,47.85 148.28,47.24 145.69,47.24 145.69,36.42 145.69,35.2 141.73,31.24 140.51,31.24 139.75,30.48 | 139.75,30.48 RN1.8 139.75,30.48
N$72
  Bottom 0.203: LATCH1.12 147.37,15.24 148.9,16.76 148.9,30.48 147.37,30.48 RN1.9
N$73  (via drill 0.61)
  Top 0.152: v117.2,16.76 118.11,17.68 v118.11,20.12
  Bottom 0.152: v117.2,16.76 49.84,16.76 49.38,17.22 46.18,17.22 45.72,17.68 IC3.13 | v118.11,20.12 118.26,20.27 121.92,20.27 LATCH3.14
N$74
  Top 0.203: LATCH1.9 147.37,7.62 149.81,10.06 149.81,35.66 147.37,38.1 RN1.12
N$75
  Top 0.203: LATCH1.10 147.37,10.21 149.35,12.19 149.35,33.53 147.37,35.51 RN1.11
N$76
  Top 0.203: LATCH1.11 147.37,12.8 148.9,14.33 148.9,31.39 147.37,32.92 RN1.10
N$77
  Top 0.203: LED1B.4 139.6,58.37 138.53,57.3 138.53,53.34 LED1A.1
  Bottom 0.203: RN1.5 139.6,38.1 138.07,39.62 138.07,53.34 138.38,53.34 LED1A.1
N$78
  Bottom 0.203: 140.82,63.4 140.82,60.66 140.06,59.89 137.47,59.89 137.47,37.8 139.6,35.66 RN1.6 | 140.82,63.4 139.75,63.4 LED1B.2 | LED1A.9 140.97,63.4 140.82,63.4
N$79
  Top 0.203: LED1A.10 138.53,68.58 139.6,67.51 139.6,66.14 LED1B.1 139.6,65.99 137.47,63.86 137.47,51.66 138.38,51.66 141.28,48.77 141.28,34.59 139.75,33.07 RN1.7
N$80  (via drill 0.61)
  Top 0.152: v141.28,26.98 141.28,19.36 139.75,17.83 LATCH1.4
  Bottom 0.152: v141.28,26.98 138.07,30.18 138.07,34.59 140.66,34.59 141.28,35.2 141.28,40.54 139.75,40.54 RN1.4
N$81  (via drill 0.61)
  Top 0.203: v142.04,40.84 142.04,17.53 139.75,15.24 LATCH1.5
  Bottom 0.203: v142.04,40.84 139.75,43.13 RN1.3
N$82
  Top 0.203: LATCH1.6 139.6,12.8 138.07,14.33 138.07,44.2 139.6,45.72 RN1.2
N$83
  Top 0.203: LATCH1.7 139.6,10.21 137.62,12.19 137.62,46.18 139.6,48.16 RN1.1
N$84
  Top 0.203: LED1A.7 146.15,68.58 147.22,67.51 147.22,66.14 LED1B.10
  Bottom 0.203: RN1.13 147.37,40.69 149.5,42.82 149.5,65.99 147.37,65.99 LED1B.10
N$85
  Top 0.203: 148.44,62.33 147.37,63.4 LED1B.9 | 148.44,62.33 149.5,61.27 149.5,45.41 147.37,43.28 RN1.14 | LED1A.6 148.44,68.43 148.44,62.33
N$86
  Top 0.203: RN1.15 147.22,45.72 145.69,47.24 145.69,53.03 146,53.34 LED1A.4
  Bottom 0.203: LED1A.4 146.15,53.34 146.15,58.37 147.22,58.37 LED1B.7
N$87
  Top 0.203: LED1A.2 139.75,54.56 139.75,55.78 LED1B.5
  Bottom 0.203: LED1A.2 142.65,51.66 143.87,51.66 147.22,48.31 RN1.16
N$88
  Top 0.203: LED5B.6 96.62,55.78 97.69,54.71 97.69,53.34 LED5A.5
  Bottom 0.203: RN5.8 89,30.48 94.94,36.42 94.94,47.24 97.54,47.24 98.15,47.85 98.15,53.34 97.84,53.34 LED5A.5
N$89  (via drill 0.61)
  Top 0.203: v93.12,15.54 93.42,15.85 93.42,27.43 96.47,30.48 RN5.9
  Bottom 0.203: v93.12,15.54 96.16,15.54 96.47,15.24 LATCH5.12
N$91
  Top 0.203: LATCH5.9 96.62,7.62 99.06,10.06 99.06,35.66 96.62,38.1 RN5.12
N$92
  Top 0.203: LATCH5.10 96.62,10.21 98.6,12.19 98.6,33.53 96.62,35.51 RN5.11
N$93
  Top 0.203: LATCH5.11 96.62,12.8 98.15,14.33 98.15,31.39 96.62,32.92 RN5.10
N$94
  Bottom 0.203: 87.48,53.34 LED5A.1 87.48,53.34 | 87.48,53.34 87.33,53.34 87.33,39.62 88.85,38.1 RN5.5 | 87.48,53.34 87.48,57 88.85,58.37 LED5B.4
N$95
  Top 0.203: RN5.6 88.85,35.66 87.33,37.19 87.33,51.05 88.54,52.27 88.54,54.71 87.78,55.47 87.78,62.33 88.85,63.4 LED5B.2
  Bottom 0.203: LED5A.9 90.07,68.58 90.07,63.55 89,63.55 LED5B.2
N$96
  Top 0.203: LED5A.10 88.85,67.36 88.85,66.14 LED5B.1 88.85,65.99 86.72,63.86 86.72,52.27 86.87,52.12 86.87,35.05 88.85,33.07 RN5.7
N$97
  Top 0.203: LATCH5.4 89,17.83 90.53,19.36 90.53,39.01 89,40.54 RN5.4
N$98
  Top 0.203: LATCH5.5 89,15.24 90.98,17.22 90.98,41.15 89,43.13 RN5.3
N$99
  Top 0.203: LATCH5.6 89,12.8 91.54,14.33 91.54,43.56 89,45.72 RN5.2
N$100
  Top 0.203: LATCH5.7 89,10.21 92,12.19 92,46.18 89,48.16 RN5.1
N$101
  Top 0.203: LED5A.7 96.47,67.36 96.47,66.14 LED5B.10 96.47,65.99 93.88,63.4 93.88,43.28 96.47,40.69 RN5.13
N$102
  Top 0.203: RN5.14 96.47,43.28 94.34,45.41 94.34,61.27 96.47,63.4 LED5B.9
  Bottom 0.203: LED5A.6 97.69,68.58 97.69,63.55 96.62,63.55 LED5B.9
N$103
  Top 0.203: LED5A.4 94.94,53.03 94.94,47.24 96.47,45.72 RN5.15
  Bottom 0.203: LED5A.4 95.25,58.37 96.47,58.37 LED5B.7
N$104
  Top 0.203: LED5A.2 90.07,53.34 89,54.41 89,55.78 LED5B.5
  Bottom 0.203: RN5.16 96.47,48.31 93.12,51.66 91.9,51.66 90.22,53.34 LED5A.2
N$105
  Top 0.203: LED6B.6 83.82,55.78 85.04,54.56 85.04,53.34 LED6A.5
  Bottom 0.203: RN6.8 82.14,36.42 82.14,47.24 84.89,47.24 85.5,47.85 85.5,53.34 85.19,53.34 LED6A.5
N$106  (via drill 0.61)
  Top 0.203: v80.31,15.54 80.77,16 80.77,27.43 RN6.9
  Bottom 0.203: LATCH6.12 83.52,15.54 v80.31,15.54
N$108
  Top 0.203: LATCH6.9 86.41,10.21 86.41,35.51 RN6.12
N$109
  Top 0.203: LATCH6.10 83.82,10.21 85.95,12.34 85.95,33.38 83.82,35.51 RN6.11
N$110
  Top 0.203: LATCH6.11 83.82,12.8 85.5,14.48 85.5,31.24 83.82,32.92 RN6.10
N$111
  Top 0.203: RN6.5 74.52,39.78 74.52,53.03 74.83,53.34 LED6A.1 74.98,53.34 74.98,57.15 76.2,58.37 LED6B.4
N$112  (via drill 0.61)
  Top 0.152: v77.88,50.9 78.49,51.51 78.49,61.11 76.2,63.4 LED6B.2
  Bottom 0.152: v77.88,50.9 77.88,37.34 76.2,35.66 RN6.6 | LED6A.9 77.42,68.58 77.42,63.55 76.2,63.55 LED6B.2
N$113  (via drill 0.61)
  Top 0.152: v79.1,35.97 78.79,36.27 78.79,63.4 76.2,65.99 LED6B.1
  Top 0.203: LED6A.10 74.98,68.58 76.2,67.36 76.2,66.14 LED6B.1
  Bottom 0.152: v79.1,35.97 76.2,33.07 RN6.7
N$114  (via drill 0.61)
  Top 0.152: v74.83,28.8 74.52,28.5 74.52,19.51 76.2,17.83 LATCH6.4
  Bottom 0.152: v74.83,28.8 74.83,29.87 74.52,30.18 74.52,40.54 76.2,40.54 RN6.4
N$115  (via drill 0.61)
  Top 0.203: LATCH6.5 74.07,17.37 74.07,40.39 v73.76,40.69
  Bottom 0.203: v73.76,40.69 76.2,43.13 RN6.3
N$116
  Top 0.203: RN6.2 77.88,44.04 77.88,14.48 76.2,12.8 LATCH6.6
N$117
  Top 0.203: LATCH6.7 76.2,10.21 78.33,12.34 78.33,46.02 76.2,48.16 RN6.1
N$118
  Top 0.203: LED6A.7 82.6,68.58 83.82,67.36 83.82,66.14 LED6B.10 83.82,65.99 86.11,63.7 86.11,42.98 83.82,40.69 RN6.13
N$119
  Top 0.203: RN6.14 83.82,43.28 81.53,45.57 81.53,61.11 83.82,63.4 LED6B.9
  Bottom 0.203: LED6A.6 85.04,68.58 85.04,63.55 83.82,63.55 LED6B.9
N$120
  Top 0.203: RN6.15 82.14,47.4 82.14,53.03 82.45,53.34 LED6A.4
  Bottom 0.203: LED6A.4 82.6,53.34 82.6,58.37 83.82,58.37 LED6B.7
N$121
  Top 0.203: LED6A.2 77.42,53.34 76.2,54.56 76.2,55.78 LED6B.5
  Bottom 0.203: RN6.16 83.82,48.31 80.47,51.66 79.25,51.66 77.57,53.34 LED6A.2
N$122
  Top 0.203: LED7A.5 72.39,54.56 71.17,55.78 LED7B.6
  Bottom 0.203: LED7A.5 72.69,53.34 72.69,47.85 72.08,47.24 69.49,47.24 69.49,36.42 63.55,30.48 RN7.8
N$123  (via drill 0.61)
  Top 0.203: v67.67,15.54 68.12,16 68.12,27.58 71.02,30.48 RN7.9
  Bottom 0.203: v67.67,15.54 70.71,15.54 71.02,15.24 LATCH7.12
N$125
  Top 0.203: LATCH7.9 71.17,7.62 73.61,10.06 73.61,35.66 71.17,38.1 RN7.12
N$126
  Top 0.203: LATCH7.10 71.17,10.21 73.15,12.19 73.15,33.53 71.17,35.51 RN7.11
N$127
  Top 0.203: LATCH7.11 71.17,12.8 72.69,14.33 72.69,31.39 71.17,32.92 RN7.10
N$128
  Top 0.203: LED7B.4 63.4,58.37 62.33,57.3 62.33,53.34 LED7A.1
  Bottom 0.203: RN7.5 63.4,38.1 61.87,39.62 61.87,53.34 62.18,53.34 LED7A.1
N$129  (via drill 0.61)
  Top 0.203: v66.6,37.8 66.6,51.97 65.68,52.88 65.68,61.27 63.55,63.4 LED7B.2
  Bottom 0.203: LED7A.9 64.77,63.55 63.55,63.55 LED7B.2 | v66.6,37.8 65.68,37.8 63.55,35.66 RN7.6
N$130  (via drill 0.61)
  Top 0.203: LED7A.10 62.33,68.58 63.4,67.51 63.4,66.14 LED7B.1 63.4,65.99 62.48,65.08 62.48,61.11 v61.42,60.05
  Bottom 0.203: v61.42,60.05 61.27,60.05 61.27,35.2 63.4,33.07 RN7.7
N$131  (via drill 0.61)
  Top 0.203: v65.84,17.98 v65.84,38.71
  Bottom 0.203: v65.84,17.98 63.7,17.98 63.55,17.83 LATCH7.4 | v65.84,38.71 64.01,40.54 63.55,40.54 RN7.4
N$132
  Top 0.203: LATCH7.5 63.55,15.24 65.08,16.76 65.08,41.6 63.55,43.13 RN7.3
N$133
  Top 0.203: LATCH7.6 63.4,12.8 61.87,14.33 61.87,44.2 63.4,45.72 RN7.2
N$134
  Top 0.203: LATCH7.7 63.4,10.21 61.42,12.19 61.42,46.18 63.4,48.16 RN7.1
N$135
  Top 0.203: LED7A.7 69.95,68.58 71.02,67.51 71.02,66.14 LED7B.10 71.02,65.99 68.89,63.86 68.89,42.82 71.02,40.69 RN7.13
N$136
  Top 0.203: RN7.14 71.17,43.28 73.3,45.41 73.3,61.27 71.17,63.4 LED7B.9
  Bottom 0.203: LED7A.6 72.39,63.55 71.17,63.55 LED7B.9
N$137
  Top 0.203: LED7B.7 71.02,58.37 70.1,57.45 70.1,53.49 69.95,53.34 LED7A.4 69.8,53.34 69.49,53.03 69.49,47.24 71.02,45.72 RN7.15
N$138
  Bottom 0.203: LED7B.5 63.55,55.78 64.77,55.78 LED7A.2 66.45,51.66 67.67,51.66 71.02,48.31 RN7.16
N$139
  Top 0.203: LED8B.6 58.52,55.78 59.59,54.71 59.59,53.34 LED8A.5
  Bottom 0.203: RN8.8 50.9,30.48 56.84,36.42 56.84,47.24 59.44,47.24 60.05,47.85 60.05,53.34 59.74,53.34 LED8A.5
N$140  (via drill 0.61)
  Top 0.203: v55.02,15.54 55.32,15.85 55.32,27.43 58.37,30.48 RN8.9
  Bottom 0.203: v55.02,15.54 58.06,15.54 58.37,15.24 LATCH8.12
N$142
  Top 0.203: LATCH8.9 58.52,7.62 60.96,10.06 60.96,35.66 58.52,38.1 RN8.12
N$143
  Top 0.203: LATCH8.10 58.52,10.21 60.5,12.19 60.5,33.53 58.52,35.51 RN8.11
N$144
  Top 0.203: LATCH8.11 58.52,12.8 60.05,14.33 60.05,31.39 58.52,32.92 RN8.10
N$145
  Top 0.203: RN8.5 50.75,38.1 49.23,39.62 49.23,53.03 LED8A.1 49.53,57.15 50.75,58.37 LED8B.4
N$146
  Bottom 0.203: RN8.6 50.9,35.66 55.63,40.39 55.63,55.02 51.36,55.02 51.21,54.86 50.29,54.86 49.68,55.47 49.68,63.4 50.75,63.4 LED8B.2 50.9,63.55 51.97,63.55 51.97,68.58 LED8A.9
N$147
  Top 0.203: LED8A.10 50.75,67.36 50.75,66.14 LED8B.1 50.75,65.99 48.62,63.86 48.62,39.62 49.07,39.17 49.07,34.75 50.75,33.07 RN8.7
N$148
  Top 0.203: LATCH8.4 50.9,17.83 52.43,19.36 52.43,39.01 50.9,40.54 RN8.4
N$149
  Top 0.203: LATCH8.5 50.9,15.24 52.93,16.76 52.93,41.6 50.9,43.13 RN8.3
N$150
  Top 0.203: LATCH8.6 50.9,12.8 53.44,14.33 53.44,44.2 50.9,45.72 RN8.2
N$151
  Top 0.203: LATCH8.7 50.9,10.21 53.9,12.19 53.9,46.18 50.9,48.16 RN8.1
N$152
  Top 0.203: LED8B.10 58.37,66.14 58.37,67.36 LED8A.7 57.15,70.26 60.05,70.26 60.66,69.65 60.66,42.82 58.52,40.69 RN8.13
N$153
  Top 0.203: RN8.14 58.37,43.28 56.24,45.41 56.24,61.27 58.37,63.4 LED8B.9 58.52,63.55 59.44,64.47 59.44,68.43 59.59,68.58 LED8A.6
N$154
  Top 0.203: LED8B.7 58.37,58.37 57.3,57.3 57.3,53.49 LED8A.4 56.84,53.03 56.84,47.24 58.37,45.72 RN8.15
N$155
  Top 0.203: LED8A.2 51.97,53.34 50.9,54.41 50.9,55.78 LED8B.5
  Bottom 0.203: RN8.16 58.37,48.31 58.37,54.86 57.61,54.86 56.69,55.78 50.9,55.78 LED8B.5
N$169  (via drill 0.61)
  Top 0.152: v78.03,8.84 80.16,6.71 80.16,3.35 80.77,2.74 82.45,2.74 82.45,7.01 82.14,7.32 82.14,18.59 83.82,20.27 LATCH6.14
  Bottom 0.152: v78.03,8.84 46.94,8.84 45.72,10.06 IC3.10
N_DATA
  Bottom 0.203: R1.1 21.64,16.61 21.64,21.49 25.3,21.49 IC2.2 25.45,21.49 26.98,19.96 36.42,19.96 37.64,18.75 59.44,18.75 | 59.44,18.75 58.52,17.83 LATCH8.13 | 59.44,18.75 70.1,18.75 | 70.1,18.75 71.02,17.83 LATCH7.13 | 82.91,18.75 83.82,17.83 LATCH6.13 | 70.1,18.75 82.91,18.75 | 95.56,18.75 96.47,17.83 LATCH5.13 | 82.91,18.75 95.56,18.75 | 108.2,18.75 109.12,17.83 LATCH4.13 | 95.56,18.75 108.2,18.75 | 121.01,18.75 121.92,17.83 LATCH3.13 | 108.2,18.75 121.01,18.75 | 121.01,18.75 133.66,18.75 134.57,17.83 LATCH2.13 134.72,17.68 135.64,16.76 146.3,16.76 147.22,17.68 LATCH1.13
N_SEGSEL0
  Bottom 0.203: 22.1,14.48 24.08,16.46 25.3,16.46 IC2.4 | 22.1,14.48 21.64,14.02 R2.1 | 62.48,26.36 51.82,26.36 50.9,25.45 LATCH8.1 50.75,25.3 49.84,24.38 37.64,24.38 36.42,23.16 20.57,23.16 20.57,16 22.1,14.48 | 62.48,26.36 63.4,25.45 LATCH7.1 | 75.29,26.36 76.2,25.45 LATCH6.1 | 62.48,26.36 75.29,26.36 | 87.94,26.36 88.85,25.45 LATCH5.1 | 75.29,26.36 87.94,26.36 | 100.58,26.36 101.5,25.45 LATCH4.1 | 87.94,26.36 100.58,26.36 | 113.39,26.36 114.3,25.45 LATCH3.1 | 100.58,26.36 113.39,26.36 | 126.03,26.36 126.95,25.45 LATCH2.1 | 113.39,26.36 126.03,26.36 | 126.03,26.36 138.68,26.36 139.6,25.45 LATCH1.1
N_SEGSEL1  (via drill 0.61)
  Top 0.152: v47.55,16.46 48.92,17.83 48.92,21.03 50.75,22.86 LATCH8.2
  Top 0.203: R3.1 21.64,11.43 25.3,11.43 IC2.6
  Bottom 0.152: v47.55,16.46 37.34,16.46 36.42,15.54 29.57,15.54 25.45,11.43 IC2.6
  Bottom 0.203: 62.48,23.77 51.82,23.77 50.9,22.86 LATCH8.2 | 62.48,23.77 63.4,22.86 LATCH7.2 | 75.29,23.77 LATCH6.2 | 62.48,23.77 75.29,23.77 | 87.94,23.77 88.85,22.86 LATCH5.2 | 75.29,23.77 87.94,23.77 | 100.58,23.77 101.5,22.86 LATCH4.2 | 87.94,23.77 100.58,23.77 | 113.39,23.77 LATCH3.2 | 100.58,23.77 113.39,23.77 | 126.03,23.77 126.95,22.86 LATCH2.2 | 113.39,23.77 126.03,23.77 | 126.03,23.77 138.68,23.77 139.6,22.86 LATCH1.2
N_SEGSEL2  (via drill 0.61)
  Top 0.152: v47.85,14.33 49.23,15.7 49.23,18.75 50.75,20.27 LATCH8.3
  Bottom 0.152: v47.85,14.33 45.41,14.33 42.82,11.73 35.81,11.73 33.07,8.99 IC2.8
  Bottom 0.203: R4.1 21.64,8.84 22.55,7.92 32,7.92 32.92,8.84 IC2.8 | 62.48,19.36 51.82,19.36 50.9,20.27 LATCH8.3 | 62.48,19.36 63.4,20.27 LATCH7.3 | 75.29,19.36 76.2,20.27 LATCH6.3 | 62.48,19.36 75.29,19.36 | 87.94,19.36 88.85,20.27 LATCH5.3 | 75.29,19.36 87.94,19.36 | 100.58,19.36 101.5,20.27 LATCH4.3 | 87.94,19.36 100.58,19.36 | 113.39,19.36 114.3,20.27 LATCH3.3 | 100.58,19.36 113.39,19.36 | 126.03,19.36 126.95,20.27 LATCH2.3 | 113.39,19.36 126.03,19.36 | 126.03,19.36 138.68,19.36 139.6,20.27 LATCH1.3
SEGSEL0  (via drill 0.61)
  Top 0.152: v29.57,34.59 29.57,58.67
  Top 0.203: v29.57,34.59 29.57,23.16 25.45,19.05 IC2.3 | 29.57,58.67 30.48,59.59 PROG.4
  Bottom 0.203: BUS.4 19.05,59.74 20.12,60.81 29.41,60.81 30.48,59.74 PROG.4 | v29.57,34.59 44.81,34.59 45.72,35.51 IC1.17
SEGSEL1
  Top 0.152: 32.46,61.72 32.92,62.18 PROG.1 32.46,61.72 | 32.46,61.72 32,61.27 32,59.28 31.39,58.67 31.39,35.36 30.02,33.98 30.02,18.59 25.45,14.02 IC2.5 | IC1.18 47.4,39.78 47.4,61.27 46.79,61.87 39.78,61.87 39.78,60.66 39.17,60.05 34.14,60.05 32.46,61.72
  Bottom 0.152: BUS.6 16.46,59.74 15.39,60.81 13.56,60.81 12.95,60.2 12.95,58.37 31.09,58.37 32,59.28 32,62.18 32.92,62.18 PROG.1
SEGSEL2  (via drill 0.61)
  Top 0.152: v35.66,39.78 35.66,22.4 36.42,21.64 36.42,14.78 33.07,11.43 IC2.9 | v30.63,40.84 30.63,58.37 31.55,59.28 31.55,61.11 30.48,62.18 PROG.3
  Bottom 0.152: BUS.8 14.02,59.59 14.94,58.67 30.94,58.67 31.55,59.28 31.55,62.18 30.48,62.18 PROG.3 | 35.81,39.62 v35.66,39.78 35.81,39.62 | 35.81,39.62 44.81,39.62 45.72,40.54 IC1.19 | v30.63,40.84 31.85,39.62 35.81,39.62
SPARE  (via drill 0.61)
  Top 0.152: v10.82,46.94 10.82,22.25 11.43,21.64 JOY1.4
  Bottom 0.152: IC1.6 38.1,50.75 39.78,49.07 39.78,46.94 v10.82,46.94 7.32,46.94 6.86,46.48 3.35,46.48 2.74,47.09 2.74,59.59 3.81,59.59 BUS.16
STROBE  (via drill 0.61)
  Top 0.152: v23.47,41.91 20.88,41.91 19.96,42.82 19.96,58.06 21.49,59.59 BUS.2
  Bottom 0.152: 23.47,42.06 27.28,42.06 27.74,41.6 37.19,41.6 38.1,40.69 IC1.10 | 23.47,42.06 15.09,42.06 14.02,43.13 IC4.4 | 23.47,42.06 v23.47,41.91
VCC
  Top 0.305: LED1B.8 147.22,60.96 139.75,60.96 LED1B.3 | 51.89,59.97 50.9,60.96 LED8B.3 | 51.89,59.97 51.97,59.89 51.97,55.93 54.56,53.34 LED8A.3 | LED8A.8 54.56,68.58 51.97,65.99 51.97,60.05 51.89,59.97 | LED4B.3 101.5,60.96 96.62,60.96 LED5B.8 | R1.2 16.61,16.46 16.61,14.02 R2.2 16.61,13.87 16.61,11.43 | LATCH1.15 147.22,22.86 144.93,22.86 144.78,22.86 | LATCH2.15 134.57,22.86 132.13,22.86 132.08,22.86 | LATCH3.15 119.48,22.86 119.38,22.86 | LATCH4.15 109.12,22.86 106.83,22.86 106.68,22.86 | LATCH5.15 96.47,22.86 94.03,22.86 93.98,22.86 | LATCH6.15 81.38,22.86 81.28,22.86 | LATCH7.15 71.02,22.86 68.73,22.86 68.58,22.86 | LATCH8.15 58.37,22.86 55.93,22.86 55.88,22.86 | IC3.6 38.1,12.65 43.13,12.65 43.18,12.65 | IC1.20 45.72,43.13 44.04,41.45 44.04,25.15 44.12,25.07 | 55.88,9.14 55.78,9.14 43.28,9.14 43.18,9.14 | 16.61,10.36 16.61,10.21 | 16.61,10.36 16.61,11.43 | 16.61,10.21 16.61,8.99 R4.2 | 16.61,11.43 R3.2 16.61,11.43 | 30.48,10.21 C10.1 | 30.48,10.21 30.48,21.64 32.92,24.08 IC2.14 | 16.61,10.21 30.48,10.21 | C11.1 3.81,54.56 3.81,48.31 5V.1 3.81,48.16 3.81,39.47 POT1.1 | POT2.1 3.81,21.64 JOY1.1 3.81,21.49 3.81,12.8 JOY2/TWI.1 3.81,12.65 3.81,10.36 16.61,10.36 | PROG.2 33.07,59.59 36.42,56.24 36.42,49.99 38.1,48.31 IC1.7
  Top 0.406: C1.1 144.78,22.86 144.78,24.13 146.05,25.4 LATCH1.16 | C2.1 132.08,22.86 132.08,24.13 133.35,25.4 LATCH2.16 | C3.1 119.38,22.86 119.38,24.13 120.65,25.4 LATCH3.16 | C4.1 106.68,22.86 106.68,24.13 107.95,25.4 LATCH4.16 | C5.1 93.98,22.86 93.98,24.13 95.25,25.4 LATCH5.16 | C6.1 81.28,22.86 81.28,24.13 82.55,25.4 LATCH6.16 | C7.1 68.58,22.86 68.58,24.13 69.85,25.4 LATCH7.16 | C8.1 55.88,9.14 55.88,22.86 55.88,24.13 57.15,25.4 LATCH8.16 | C9.1 43.18,9.14 43.18,12.65 43.18,24.13 44.12,25.07 44.45,25.4 IC3.16
  Bottom 0.305: 118.11,60.96 LED3A.3 | 118.11,60.96 LED3B.3 109.27,60.96 LED4B.8 109.12,60.96 105.46,60.96 | 118.11,60.96 LED3A.8 | 118.11,60.96 LED3B.8 126.95,60.96 LED2B.3 127.1,60.96 130.91,60.96 | 143.56,60.96 143.56,53.34 LED1A.3 | 143.56,60.96 147.22,60.96 LED1B.8 | 143.56,60.96 143.56,68.58 LED1A.8 | 130.91,60.96 130.91,53.34 LED2A.3 | 130.91,60.96 134.57,60.96 LED2B.8 134.72,60.96 139.6,60.96 LED1B.3 | 130.91,60.96 130.91,68.58 LED2A.8 | 67.36,60.96 67.36,53.34 LED7A.3 | 67.36,60.96 71.02,60.96 LED7B.8 71.17,60.96 LED6B.3 80.01,60.96 | 67.36,60.96 67.36,68.58 LED7A.8 | 67.36,60.96 63.55,60.96 LED7B.3 63.4,60.96 58.52,60.96 LED8B.8 58.37,60.96 50.9,60.96 LED8B.3 | 105.46,60.96 105.46,53.34 LED4A.3 | 105.46,60.96 105.46,68.58 LED4A.8 | 105.46,60.96 101.65,60.96 LED4B.3 | 80.01,60.96 LED6A.3 | 80.01,60.96 LED6A.8 | 80.01,60.96 LED6B.8 88.85,60.96 LED5B.3 89,60.96 92.81,60.96 | 92.81,60.96 92.81,53.34 LED5A.3 | 92.81,60.96 96.47,60.96 LED5B.8 | 92.81,60.96 92.81,68.58 LED5A.8 | 70.18,24.46 70.1,24.38 59.44,24.38 58.52,25.3 LATCH8.16 | 70.18,24.46 71.02,25.3 LATCH7.16 | 82.98,24.46 82.91,24.38 70.26,24.38 70.18,24.46 | 82.98,24.46 83.82,25.3 LATCH6.16 | 95.63,24.46 95.56,24.38 83.06,24.38 82.98,24.46 | 95.63,24.46 96.47,25.3 LATCH5.16 | 108.28,24.46 108.2,24.38 95.71,24.38 95.63,24.46 | 108.28,24.46 109.12,25.3 LATCH4.16 | 121.08,24.46 121.01,24.38 108.36,24.38 108.28,24.46 | 121.08,24.46 121.92,25.3 LATCH3.16 | 133.73,24.46 133.66,24.38 121.16,24.38 121.08,24.46 | 133.73,24.46 134.57,25.3 LATCH2.16 | LATCH1.16 147.22,25.3 146.3,24.38 133.81,24.38 133.73,24.46 | C10.1 31.7,2.59 41.91,2.59 43.13,3.81 C9.1
  Bottom 0.305: 47.24,44.2 46.63,44.2 45.72,43.28 IC1.20 | 47.24,44.2 54.56,44.2 54.56,53.34 LED8A.3 | IC4.6 13.87,38.1 13.41,37.64 9.45,37.64 9.3,37.49 5.64,37.49 3.81,39.32 POT1.1 3.81,39.17 POT2.1 | 47.24,44.2 IC1.21 | 22.48,49.91 23.16,49.23 33.07,49.23 | 22.48,49.91 21.64,50.75 IC4.16 | 33.07,49.23 37.19,49.23 38.1,48.31 IC1.7 | 5V.1 3.81,48.31 5.64,50.14 12.5,50.14 12.8,49.84 22.4,49.84 22.48,49.91 | 33.07,53.34 R5.2 33.07,53.34 | 33.07,49.23 33.07,53.34

## Text on the board
tNames: RESET | 1 | 1 | 2 | 2 | GND | Modular Display Board v1.1 | Jeremy Elson Sep 2009